# Allegro board Z-WAVE PROG_new.brd
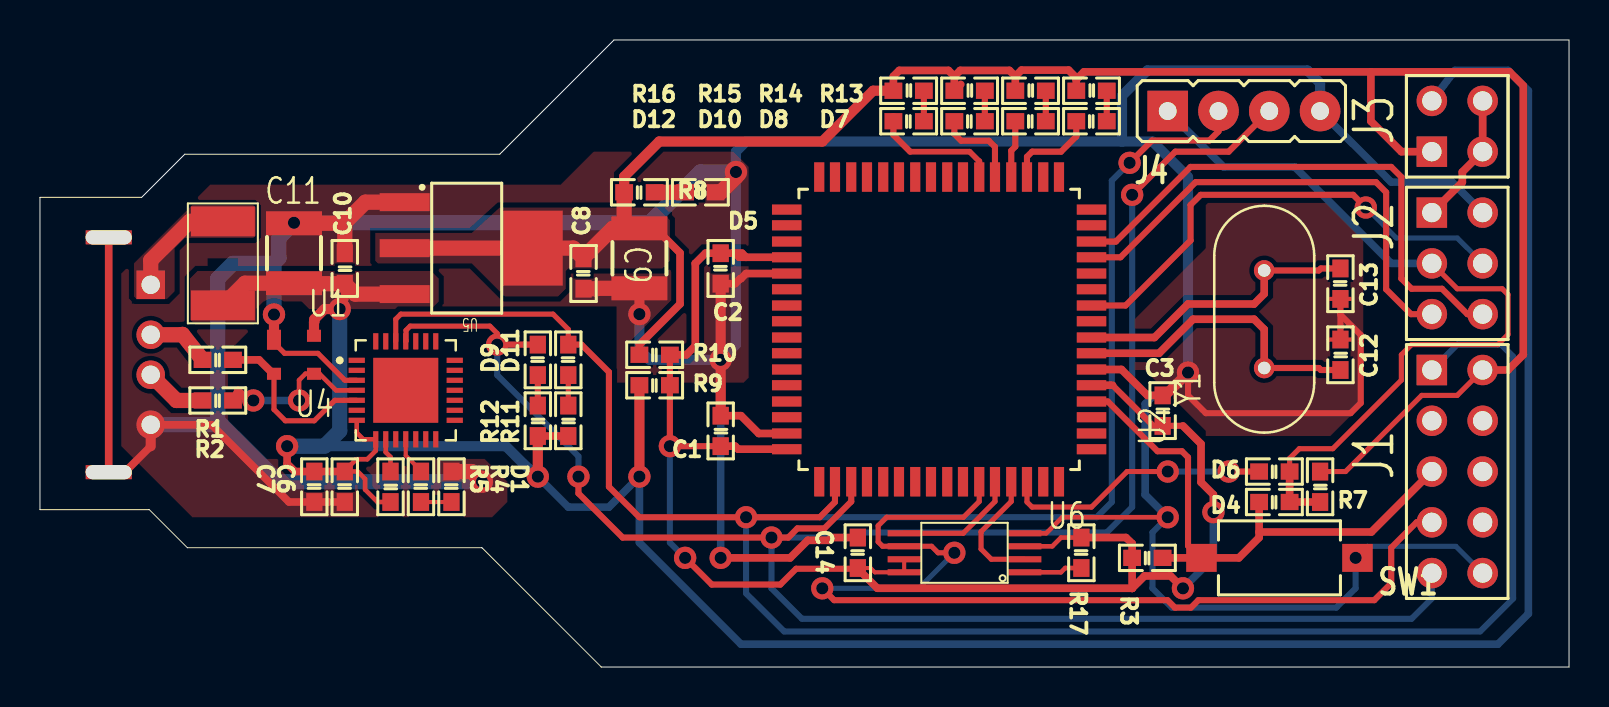
[diagram p0: board, top side]
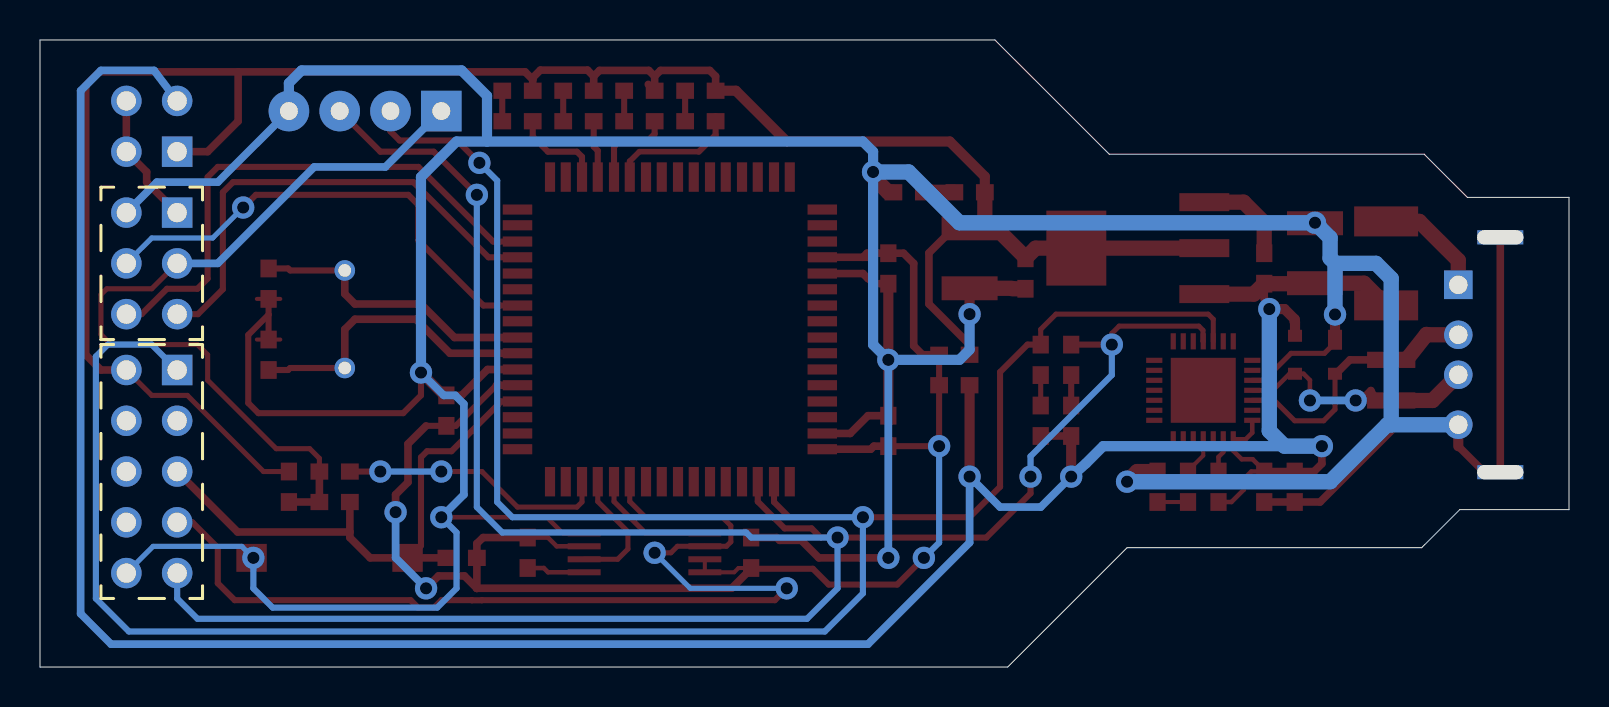
[diagram p1: board, bottom side, seen from below]

Outline 76.45 x 31.37 mm; copper layers: TOP, BOTTOM. Coordinates in mm from the lower left corner of the outline.
Outline path: 0,23.5 0,7.87 5.46,7.87 7.37,5.97 22.1,5.97 28.07,0 76.45,0 76.45,31.37 28.7,31.37 22.99,25.65 7.24,25.65 5.08,23.5 0,23.5

## Placement (name value [footprint] x y rotation side)
C1  33nF  [C0603]  34.04 11.81 90 top
C2  33nF  [C0603]  34.04 19.94 270 top
C3  33nF  [C0603]  56.13 12.83 90 top
C6  1uF  [C0603]  15.24 9.02 270 top
C7  100nF  [C0603]  13.72 9.02 270 top
C8  104  [C0603]  27.18 19.68 270 top
C9  10uF  [C1210]  29.97 20.45 270 top
C10  104  [C0603]  15.24 19.94 90 top
C11  10uF  [C1210]  12.7 20.7 90 top
C12  27pF  [C0603]  65.02 15.62 90 top
C13  27pF  [C0603]  65.02 19.18 270 top
C14  33nF  [C0603]  40.89 5.71 270 top
D1  LED  [D0603]  20.57 9.02 270 top
D4  DIODE  [D0603]  61.72 8.25 0 top
D5  LED  [D0603]  33.02 23.75 180 top
D6  DIODE  [D0603]  61.72 9.78 0 top
D7  LED  [D0603]  52.58 27.3 0 top
D8  LED  [D0603]  49.53 27.3 0 top
D9  LED  [D0603]  24.89 15.37 270 top
D10  LED  [D0603]  46.48 27.3 0 top
D11  LED  [D0603]  26.42 15.37 270 top
D12  LED  [D0603]  43.43 27.3 0 top
F1  -  [FUSE]  9.14 20.19 270 top
J1  ISP_ATPROG  [HEADER_5X2]  69.6 14.86 0 top
J2  HEADER 3X2  [HEADER_3X2]  69.6 22.73 0 top
J3  HEADER 2X2  [HEADER_2X2]  69.6 25.78 90 top
J4  HEADER 4  [HEADER_4X1_2P54MM]  56.39 27.81 0 top
R1  10R  [R0603]  8.89 15.37 0 top
R2  10R  [R0603]  8.89 13.33 0 top
R3  22K  [R0603]  55.37 5.46 0 top
R4  1K  [R0603]  19.05 9.02 270 top
R5  10K  [R0603]  17.53 9.02 90 top
R7  22K  [R0603]  64.01 9.02 90 top
R8  220  [R0603]  29.97 23.75 0 top
R9  0R  [R0603]  30.73 14.1 0 top
R10  0R  [R0603]  30.73 15.62 0 top
R11  220  [R0603]  26.42 12.32 90 top
R12  220  [R0603]  24.89 12.32 90 top
R13  220  [R0603]  52.58 28.83 180 top
R14  220  [R0603]  49.53 28.83 180 top
R15  220  [R0603]  46.48 28.83 180 top
R16  220  [R0603]  43.43 28.83 180 top
R17  22K  [R0603]  52.07 5.71 270 top
SW1  RST  [SMD_TACT_SWITCH_2PIN]  61.98 5.46 0 top
U1  CP2102  [QFN50P500X500X100-29N]  18.29 13.84 0 top
U2  ATMEGA128  [QFP80P1600X1600X120-64N]  44.96 16.89 90 top
U3  USB  [USBA_MALE]  4.83 15.62 270 top
U4  ESD_PRTR5  [SOT143B]  12.7 15.62 270 top
U5  LM1117  [SOT-223]  21.34 20.95 180 top
U6  AT25256/SOIC  [TSSOP-8]  46.23 5.71 180 top
Y1  CRYSTAL  [XTAL_ECS-250-20-4VX]  61.21 17.4 90 top

## Library data of the parts
C1-C3 C6-C8 C10 C12-C14 = CAP NP
C9 C11 = CAP: User Part Number: PartNr
D1 D5 D7-D12 = LED
D4 D6 = DIODE
F1 = FUSE
J1 = HEADER 5X2
J2 = HEADER 3X2
J3 = HEADER 2X2
J4 = HEADER 4
R1-R5 R7-R17 = RESISTOR
SW1 = SW PUSHBUTTON-SPST-NC
U1 = CP2102_1
U2 = ATMEGA128_0
U3 = USB
U4 = ESD_PRTR5_0
U5 = AMS1117/LM1117_1
U6 = AT25256/SOIC
Y1 = CRYSTAL

## Footprints (pads in the part's own frame, mm; a bottom-side part is the same pattern mirrored in y, then rotated)
C0603
  rect 0.889x0.813 smd: 1(-0.762,0) 2(0.762,0)
C1210
  rect 1.2x2.8 smd: 1(-1.5,0) 2(1.5,0)
D0603
  rect 0.889x0.813 smd: 1(-0.762,0) 2(0.762,0)
FUSE
  rect 1.5x3.2 smd: 1(-2.1,0) 2(2.1,0)
HEADER_2X2
  rect 1.524x1.524 hole 0.965: 1(0,0)
  round 1.524 hole 0.965: 2(2.54,0) 3(0,-2.54) 4(2.54,-2.54)
HEADER_3X2
  rect 1.524x1.524 hole 0.965: 1(0,0)
  round 1.524 hole 0.965: 2(2.54,0) 3(0,-2.54) 4(2.54,-2.54) 5(0,-5.08) 6(2.54,-5.08)
HEADER_4X1_2P54MM
  rect 2.032x2.032 hole 0.889: 1(0,0)
  round 2.032 hole 0.889: 2(2.54,0) 3(5.08,0) 4(7.62,0)
HEADER_5X2
  rect 1.524x1.524 hole 0.965: 1(0,0)
  round 1.524 hole 0.965: 2(2.54,0) 3(0,-2.54) 4(2.54,-2.54) 5(0,-5.08) 6(2.54,-5.08) 7(0,-7.62) 8(2.54,-7.62) 9(0,-10.16) 10(2.54,-10.16)
QFN50P500X500X100-29N
  rect 3.25x3.25 smd: (0,0)
  rect 0.81x0.26 smd: 1(-2.45,1.5) 2(-2.45,1) 3(-2.45,0.5) 4(-2.45,0) 5(-2.45,-0.5) 6(-2.45,-1) 7(-2.45,-1.5) 15(2.45,-1.5) 16(2.45,-1) 17(2.45,-0.5) 18(2.45,0) 19(2.45,0.5) 20(2.45,1) 21(2.45,1.5)
  rect 0.26x0.81 smd: 8(-1.5,-2.45) 9(-1,-2.45) 10(-0.5,-2.45) 11(0,-2.45) 12(0.5,-2.45) 13(1,-2.45) 14(1.5,-2.45) 22(1.5,2.45) 23(1,2.45) 24(0.5,2.45) 25(0,2.45) 26(-0.5,2.45) 27(-1,2.45) 28(-1.5,2.45)
QFP80P1600X1600X120-64N
  rect 1.473x0.508 smd: 1(-7.62,5.994) 2(-7.62,5.207) 3(-7.62,4.394) 4(-7.62,3.607) 5(-7.62,2.794) 6(-7.62,2.007) 7(-7.62,1.194) 8(-7.62,0.406) 9(-7.62,-0.406) 10(-7.62,-1.194) 11(-7.62,-2.007) 12(-7.62,-2.794) 13(-7.62,-3.607) 14(-7.62,-4.394) 15(-7.62,-5.207) 16(-7.62,-5.994) 33(7.62,-5.994) 34(7.62,-5.207) 35(7.62,-4.394) 36(7.62,-3.607) 37(7.62,-2.794) 38(7.62,-2.007) 39(7.62,-1.194) 40(7.62,-0.406) 41(7.62,0.406) 42(7.62,1.194) 43(7.62,2.007) 44(7.62,2.794) 45(7.62,3.607) 46(7.62,4.394) 47(7.62,5.207) 48(7.62,5.994)
  rect 0.508x1.473 smd: 17(-5.994,-7.62) 18(-5.207,-7.62) 19(-4.394,-7.62) 20(-3.607,-7.62) 21(-2.794,-7.62) 22(-2.007,-7.62) 23(-1.194,-7.62) 24(-0.406,-7.62) 25(0.406,-7.62) 26(1.194,-7.62) 27(2.007,-7.62) 28(2.794,-7.62) 29(3.607,-7.62) 30(4.394,-7.62) 31(5.207,-7.62) 32(5.994,-7.62) 49(5.994,7.62) 50(5.207,7.62) 51(4.394,7.62) 52(3.607,7.62) 53(2.794,7.62) 54(2.007,7.62) 55(1.194,7.62) 56(0.406,7.62) 57(-0.406,7.62) 58(-1.194,7.62) 59(-2.007,7.62) 60(-2.794,7.62) 61(-3.607,7.62) 62(-4.394,7.62) 63(-5.207,7.62) 64(-5.994,7.62)
R0603
  rect 0.889x0.813 smd: 1(-0.762,0) 2(0.762,0)
SMD_TACT_SWITCH_2PIN
  rect 1.524x1.397 smd: 1(-3.9,0) 2(3.9,0)
SOT143B
  rect 1x0.7 smd: 1(-0.75,-1)
  rect 0.6x0.7 smd: 2(0.95,-1) 3(0.95,1) 4(-0.95,1)
SOT-223
  rect 2.5x0.9 smd: 1(3.1,-2.3) 2(3.1,0) 3(3.1,2.3)
  rect 3x3.75 smd: 4(-3.3,0)
TSSOP-8
  rect 1.651x0.305 smd: 1(-3.017,0.975) 2(-3.017,0.325) 3(-3.017,-0.325) 4(-3.017,-0.975) 5(3.017,-0.975) 6(3.017,-0.325) 7(3.017,0.325) 8(3.017,0.975)
USBA_MALE
  rect 1.428x1.428 hole 0.92: 1(-3.5,0.71)
  round 1.428 hole 0.92: 2(-1,0.71) 3(1,0.71) 4(3.5,0.71)
  rect 0.7x2.3 hole 0.7x2.3: 5(-5.875,-1.39) 6(5.875,-1.39)
XTAL_ECS-250-20-4VX
  round 1.03 hole 0.63: 1(-2.44,0) 2(2.44,0)

## Nets
3V3: C8.1 C9.1 J1.2 J3.1(3) R7.2 R8.1 R10.1 R13.2 R14.2 R15.2 R16.2 U5.2(VO) U5.4(PAD)
5V: C6.1 C7.1 C10.1 C11.1 F1.2 J3.2(4) R5.1 R9.1 R11.1 R12.1 U1.7(REGIN) U1.8(VBUS) U4.4(VCC) U5.3(VI)
GND: C1.2 C2.2 C3.2 C6.2 C7.2 C8.2 C9.2 C10.2 C11.2 C12.2 C13.2 C14.1 D1.1(CATHODE) D5.1(CATHODE) J1.10 J2.2 J4.4 SW1.2 U1.3(GND) U2.22(GND_1) U2.53(GND_2) U2.63(GND) U3.4(GND) U3.5(SHEILD0) U3.6(SHEILD1) U4.1(GND) U5.1(GND) U6.4
CS_AT_N: U2.17((OC2/OC1C) PB7)
LEDA_AT: D7.1(CATHODE) U2.35(PC0 (A8))
LEDB_AT: D8.1(CATHODE) U2.36(PC1 (A9))
LEDC_AT: D10.1(CATHODE) U2.37(PC2 (A10))
LEDD_AT: D12.1(CATHODE) U2.38(PC3 (A11))
MCU_MISO: U2.13((MISO) PB3) U6.2(SO)
MCU_MOSI: U2.12((MOSI) PB2) U6.5(SI)
MCU_PDI: D11.1(CATHODE) J1.1 J4.2 U1.26(TXD) U2.2(RXD0/(PDI) PE0)
MCU_PDO: D9.1(CATHODE) J1.9 J4.3 U1.25(RXD) U2.3((TXD0/PDO) PE1)
MCU_RESET: D4.1(K) J1.5 R3.2 SW1.1 U2.20(RESET)
MCU_SCK: J1.7 U2.11((SCK) PB1) U6.6(SCLK)
MCU_VCC: C1.1 C2.1 C3.1 C14.2 R3.1 R9.2 R10.2 R17.1 U2.21(VCC_1) U2.52(VCC_2) U2.64(AVCC) U6.3(W\P\) U6.7(H\O\L\D\) U6.8(VCC)
ZWARE_RESET: D4.2(A) D6.2(A) J2.3 J4.1 R7.1
ZWARE_RESET_AT: D6.1(K) U2.14((OC0) PB4)
ZWARE_SPI_MISO: J2.6 U2.30((XCK1) PD5)
ZWARE_SPI_MOSI: J2.4 U2.26((SDA/INT1) PD1)
ZWARE_SPI_SCK: J2.5 U2.29((ICP1) PD4)
N00928: F1.1 U3.1(VBUS)
N01000: R1.1 U3.2(D-)
N01004: R2.1 U3.3(D+)
N01008: R1.2 U1.5(D-) U4.2(I/O1)
N01111: R2.2 U1.4(D+) U4.3(I/O2)
N01827: C12.1 U2.23(XTAL2) Y1.1
N01839: C13.1 U2.24(XTAL1) Y1.2
N007350: D5.2(ANODE) R8.2
N07800: R5.2 U1.9(RST)
N2005450: R4.1 U1.11(SUSPEND)
N2005452: D1.2(ANODE) R4.2
N2010082: D7.2(ANODE) R13.1
N2010088: D8.2(ANODE) R14.1
N2029623: R17.2 U6.1(C\S\)
N2044968: J2.1 J3.3(1) J3.4(2)
N2049166: D10.2(ANODE) R15.1
N2049170: D12.2(ANODE) R16.1
N20114400: D11.2(ANODE) R11.2
N20116730: D9.2(ANODE) R12.2

Pads without a net: J1 3 4 6 8; U1 1 2 6 10 12 13 14 15 16 17 18 19 20 21 22 23 24 27 28; U2 1 4 5 6 7 8 9 10 15 16 18 19 25 27 28 31 32 33 34 39 40 41 42 43 44 45 46 47 48 49 50 51 54 55 56 57 58 59 60 61 62

## Via types
v1: diameter 1.118, hole 0.61, TOP to BOTTOM, 31 vias

## Routing (per net, layer and track width the routed paths; a pad name or vN(x,y) marks a point on that pad's centre or on a via; arc(x,y) is an arc through that point)
3V3: length 107.1
  TOP w0.254: R7.2 65.28,9.78 69.09,13.59 70.87,13.59 J1.2
  TOP w0.381: 48.77,29.55 49.08,29.86 51.44,29.86 51.82,29.48 51.82,29.39 ; 48.77,29.55 48.48,29.84 46.01,29.84 45.72,29.55 ; 48.77,29.55 R14.2 ; 46.04,29.15 R15.2 45.72,29.55 ; 66.55,29.77 66.55,27.3 68.07,25.78 J3.1 ; 66.55,29.77 73.48,29.77 74.17,29.08 74.17,15.62 73.41,14.86 J1.2 ; 66.55,29.77 52.2,29.77 51.82,29.39 ; C9.1 30.77,21.95 32,20.72 32,18.16 29.97,16.13 R10.1 ; 45.72,29.55 45.43,29.84 42.96,29.84 42.67,29.55 R16.2 ; 51.82,29.39 R13.2 51.78,28.83
  TOP w0.508: R16.2 41.66,28.83 39.12,26.29 30.96,26.29 29.21,24.54 R8.1
  TOP w0.762: C9.1 29.21,21.95 ; 29.21,21.95 28.64,21.95 27.18,20.49 C8.1 26.67,20.95 U5.4 U5.2 ; 29.21,21.95 R8.1
5V: length 142.5
  TOP w0.229: 16.79,11.3 16.79,11.29 ; 16.79,11.3 U1.8 16.17,11.39 15.84,11.72 U1.7 ; 16.79,11.3 16.79,10.82 16.36,10.39 15.82,10.39 15.24,9.82 C6.1 15.89,9.78 16.26,9.41 16.26,8.88 16.88,8.25 R5.1
  TOP w0.381: 14.73,17.91 15.24,18.41 C10.1 ; C6.1 C7.1 12.75,9.78 12.36,10.17 v1(12.36,11.05) ; R11.1 R12.1
  TOP w0.508: v1(14.99,17.91) 14.22,17.91 13.72,17.4 13.72,17.27 13.7,17.25 U4.4 ; v1(29.97,9.53) R9.1 ; R12.1 v1(24.89,9.53)
  TOP w0.762: F1.2 10.25,19.2 C11.1 12.72,19.18 C10.1 15.76,18.66 U5.3
  BOTTOM w0.381: J3.2 70.75,29.84 73.41,29.84 74.42,28.83 74.42,2.67 72.9,1.14 35.05,1.14 29.97,6.22 v1(29.97,9.53) 28.45,8 26.42,8 v1(24.89,9.53)
  BOTTOM w0.508: v1(24.89,9.53) 24.15,10.19 23.29,11.05 14.22,11.05
  BOTTOM w0.762: v1(12.36,11.05) 14.22,11.05 14.99,11.81 v1(14.99,17.91)
GND: length 275.4
  TOP w0.203: 65.61,16.38 C12.2 64.44,16.38 ; 65.61,18.41 C13.2 64.44,18.41
  TOP w0.229: U6.4 50.31,6.69 51.11,7.49 v1(56.39,7.49)
  TOP w0.254: U1.3 15.25,14.34 13.9,15.69 12.23,15.69 11.7,16.22 U4.1 ; 27.84,18.92 27.86,18.95
  TOP w0.305: 65.02,17.63 66.04,16.61 66.04,13.21 65.53,12.7 58.29,12.7 57.4,13.59 v1(57.4,14.73) ; 65.02,17.63 C12.2 ; 65.02,17.63 C13.2
  TOP w0.381: v1(34.04,5.46) 37.51,5.46 38.39,6.34 39.47,6.34 39.61,6.48 C14.1 ; 5.54,11.05 4.24,9.75 U3.6 U3.5 ; v1(12.7,22.23) C11.2 ; C6.2 C7.2 12.45,8.25 8.58,12.12 U3.4 ; C1.2 35.05,12.57 35.94,11.68 U2.63 ; U2.53 35.31,19.68 35.05,19.43 35.01,19.43 34.76,19.18 C2.2 ; U2.22 54.08,14.88 55.37,13.59 C3.2 ; U5.1 17.44,23.25 17.41,23.28
  TOP w0.508: v1(29.97,17.65) C9.2 ; U3.4 5.54,11.05 ; U4.1 v1(11.7,17.64) ; C3.2 56.26,13.59 v1(57.4,14.73) ; C1.2 v1(34.04,15.37) C2.2
  TOP w0.762: C10.2 15.24,22.2 ; 15.24,22.2 15.24,22.23 16.27,23.25 17.44,23.25 ; 15.24,22.2 C11.2 ; C8.2 27.84,18.92 ; D5.1 34.04,23.75 34.8,24.51 v1(34.8,24.77) ; v1(22.1,9.27) 21.59,9.78 D1.1 ; 27.86,18.95 C9.2
  BOTTOM w0.254: J1.10 70.8,6.04 66.36,6.04 v1(65.79,5.46)
  BOTTOM w0.305: v1(65.79,5.46) 65.79,3.94 64.82,2.97 56.59,2.97 55.63,3.94 55.63,6.73 v1(56.39,7.49)
  BOTTOM w0.381: v1(56.39,7.49) 55.26,8.62 55.26,13.16 55.69,13.59 56.26,13.59 v1(57.4,14.73) ; J4.4 67.56,24.26 70.61,24.26 J2.2 ; v1(34.04,15.37) v1(34.04,5.46)
  BOTTOM w0.508: 54.1,26.29 54.1,28.57 55.37,29.84 63.37,29.84 64.01,29.21 J4.4 ; 54.1,26.29 35.31,26.29 34.8,25.78 v1(34.8,24.77) 34.8,16.13 v1(34.04,15.37) 30.48,15.37 29.97,15.88 v1(29.97,17.65) ; 54.1,26.29 55.63,26.29 57.4,24.51 v1(57.4,14.73)
  BOTTOM w0.762: 8.89,12.12 U3.4 ; 8.89,12.12 9.09,12.12 11.94,9.27 v1(22.1,9.27) ; 8.89,12.12 8.89,19.43 9.65,20.19 11.68,20.19 ; v1(11.7,17.64) 11.7,20.19 11.68,20.19 ; 11.68,20.19 11.95,20.45 11.95,21.47 v1(12.7,22.23) 30.48,22.23 33.02,24.77 v1(34.8,24.77)
LEDA_AT: length 4.7
  TOP w0.305: U2.35 49.35,25.53 49.61,25.78 51.05,25.78 51.82,26.54 D7.1
LEDB_AT: length 2.9
  TOP w0.305: U2.36 48.56,25.83 48.77,26.04 D8.1
LEDC_AT: length 4.4
  TOP w0.305: U2.37 47.75,26.02 47.45,26.33 46.06,26.33 45.72,26.67 D10.1
LEDD_AT: length 6.6
  TOP w0.279: 43.51,25.78 46.48,25.78 46.96,25.3
  TOP w0.305: U2.38 46.96,25.3 ; 42.67,27.56 D12.1 42.67,26.62 43.51,25.78
MCU_MISO: length 6.4
  TOP w0.254: U6.2 47.57,5.39 47.06,5.9 47.06,6.77 48.56,8.28 U2.13
MCU_MOSI: length 6.2
  TOP w0.254: U2.12 47.75,8.28 46.16,6.69 U6.5
MCU_PDI: length 135.2
  TOP w0.254: D11.1 26.42,16.89 25.65,17.65 18.04,17.65 17.79,17.4 U1.26
  TOP w0.305: v1(54.48,25.22) 55.6,26.34 58.47,26.34 58.93,26.8 J4.2 ; U2.2 39.75,8.25 38.99,7.49 v1(35.31,7.49) 29.97,7.49 28.45,9.02 28.45,14.76 27.08,16.13 D11.1
  BOTTOM w0.305: J1.1 70.87,16.13 73.06,16.13 73.66,15.53 73.66,3.43 72.01,1.78 37.21,1.78 35.31,3.68 v1(35.31,7.49) 52.83,7.49 53.59,8.25 53.59,24.33 v1(54.48,25.22)
MCU_PDO: length 114.5
  TOP w0.254: v1(22.86,16.13) 22.86,16.69 22.49,17.05 18.51,17.05 18.3,16.85 18.3,16.31 U1.25
  TOP w0.305: U2.3 40.56,8.28 39.22,6.93 37.87,6.93 37.41,6.48 v1(36.58,6.48) 29.13,6.48 26.92,8.69 v1(26.92,9.53) ; 54.61,23.24 v1(54.61,23.62) 56.77,25.78 59.44,25.78 J4.3 ; D9.1 v1(22.86,16.13)
  BOTTOM w0.305: v1(22.86,16.13) 22.86,14.61 26.92,10.54 v1(26.92,9.53) ; J1.9 69.6,3.43 68.58,2.41 38.1,2.41 36.58,3.94 v1(36.58,6.48) 40.89,6.48 41.15,6.73 53.34,6.73 54.61,8 v1(54.61,23.62)
MCU_RESET: length 28.2
  TOP w0.305: 58.01,5.46 57.4,6.07 57.4,10.49 57.1,10.79 55.88,10.79 53.39,13.28 U2.20
  TOP w0.381: 60.96,6.76 60.96,6.48 59.94,5.46 SW1.1 R3.2 ; 60.96,6.76 D4.1 ; 60.96,6.76 66.57,6.76 J1.5
MCU_SCK: length 52.4
  TOP w0.254: v1(45.72,5.71) 44.91,5.71 44.58,6.04 U6.6 42.13,6.04 41.91,6.26 41.91,7.07 42.33,7.49 46.18,7.49 46.96,8.28 U2.11
  TOP w0.305: J1.7 68.83,7.24 67.56,5.97 67.56,4.19 66.72,3.34 57.92,3.34 57.55,2.97 56.75,2.97 56.38,3.34 54.86,3.34 54.86,3.34 54.36,3.34 54.36,3.34 39.71,3.34 v1(39.12,3.94)
  BOTTOM w0.254: v1(39.12,3.94) 43.94,3.94 v1(45.72,5.71)
MCU_VCC: length 80
  TOP w0.203: U6.7 U6.8 41.74,4.74 41.53,4.95 C14.2
  TOP w0.229: U6.3 50.62,6.04 51.05,6.48 R17.1
  TOP w0.254: 40.89,4.91 C14.2
  TOP w0.305: R10.2 R9.2 v1(31.5,11.05) C1.1 ; 57.15,12.06 C3.1 55.66,12.06 53.63,14.1 ; v1(32.26,5.46) 33.59,4.12 37.02,4.12 37.81,4.91 40.89,4.91
  TOP w0.381: 57.15,12.06 58.05,11.16 58.05,9.24 58.67,8.62 v1(58.67,7.75) ; 40.89,4.91 41.87,3.94 54.61,3.94 54.61,3.94 ; 54.61,3.94 55.23,4.56 56.53,4.56 v1(57.15,3.94) ; 54.61,3.94 R3.1 54.61,6.18 54.3,6.48 R17.1 ; 53.63,14.1 U2.21 ; 34.76,20.7 35.1,20.7 35.31,20.5 ; 34.76,20.7 34.96,20.5 35.31,20.5 ; 34.76,20.7 C2.1 33.27,20.7 32.77,20.19 32.77,16.07 32.32,15.62 R10.2 ; U2.64 34.91,10.9 34.76,11.05 C1.1 ; 35.31,20.5 U2.52
  BOTTOM w0.305: v1(32.26,5.46) 31.5,6.22 v1(31.5,11.05)
  BOTTOM w0.381: v1(57.15,3.94) 58.67,5.46 v1(58.67,7.75)
ZWARE_RESET: length 40.8
  TOP w0.254: D6.2 62.48,10.44 62.97,10.92 64.64,10.92 68.07,14.35 68.07,15.62 68.58,16.13 72.9,16.13 73.41,16.64 73.41,18.63 73.11,18.92 70.87,18.92 J2.3
  TOP w0.381: R7.1 D4.2 D6.2
  BOTTOM w0.381: J4.1 59.18,25.02 62.74,25.02 67.56,20.19 J2.3
ZWARE_RESET_AT: length 13.5
  TOP w0.254: U2.14 49.35,8.25 49.61,8 52.58,8 54.36,9.78 v1(56.39,9.78)
  TOP w0.305: v1(59.44,9.78) D6.1
  BOTTOM w0.305: v1(56.39,9.78) v1(59.44,9.78)
ZWARE_SPI_MISO: length 27.1
  TOP w0.305: U2.30 53.8,21.29 57.53,25.02 67.56,25.02 68.07,24.51 68.07,19.43 68.58,18.92 70.1,18.92 71.37,17.65 J2.6
ZWARE_SPI_MOSI: length 24.3
  TOP w0.305: v1(66.29,22.99) 65.66,23.62 58.04,23.62 57.53,23.11 57.53,21.34 54.28,18.08 U2.26
  BOTTOM w0.254: v1(66.29,22.99) 67.82,21.46 70.87,21.46 J2.4
ZWARE_SPI_SCK: length 24.2
  TOP w0.305: U2.29 54.03,20.5 57.78,24.26 66.8,24.26 67.31,23.75 67.31,18.9 68.55,17.65 J2.5
N00928: length 5.6
  TOP w0.762: U3.1 5.54,20.34 7.49,22.29 F1.1
N01000: length 3.2
  TOP w0.762: U3.2 7.11,16.62 7.13,16.64 R1.1
N01004: length 3.1
  TOP w0.762: R2.1 6.82,13.33 U3.3
N01008: length 9.4
  TOP w0.203: 15.2,13.34 15.2,13.34 14.74,13.34 14.74,13.34
  TOP w0.254: U1.5 14.74,13.34 ; U4.2 11.7,12.89 12.27,12.32 13.72,12.32 14.74,13.34
  TOP w0.381: R1.2 10.95,15.37 11.65,14.67 U4.2
N01111: length 8.2
  TOP w0.229: U1.4 14.8,13.84 13.97,14.67 U4.3 13.27,14.67 12.95,14.35 v1(12.95,13.33)
  TOP w0.381: v1(10.67,13.33) 10.36,13.37 9.91,13.83 R2.2
  BOTTOM w0.381: v1(10.67,13.33) v1(12.95,13.33)
N01827: length 15.3
  TOP w0.305: Y1.1 63.95,14.96 64.05,14.86 C12.1
  TOP w0.381: U2.23 55.96,15.7 57.66,17.4 60.71,17.4 61.21,16.89 Y1.1
N01839: length 14.6
  TOP w0.305: C13.1 64.05,19.94 63.95,19.84 Y1.2
  TOP w0.381: U2.24 55.73,16.48 57.4,18.16 60.71,18.16 61.21,18.67 Y1.2
N007350: length 1.5
  TOP w0.762: R8.2 D5.2
N07800: length 1.7
  TOP w0.229: R5.2 17.53,10.51 17.29,10.75 U1.9
N2005450: length 1.9
  TOP w0.203: R4.1 19.05,9.82 18.29,10.58 U1.11
N2005452: length 1.5
  TOP w0.203: R4.2 D1.2
N2010082: length 1.5
  TOP w0.305: R13.1 D7.2
N2010088: length 1.5
  TOP w0.305: R14.1 D8.2
N2029623: length 2.9
  TOP w0.229: U6.1 51.05,4.74 51.26,4.95 R17.2
N2044968: length 6.6
  TOP w0.381: J2.1 71.12,24.26 71.12,24.77 J3.3 J3.4
N2049166: length 1.5
  TOP w0.305: R15.1 D10.2
N2049170: length 1.5
  TOP w0.305: R16.1 D12.2
N20114400: length 1.5
  TOP w0.254: D11.2 R11.2
N20116730: length 1.5
  TOP w0.305: R12.2 D9.2

## Copper pours and planes (outline as drawn; the poured copper is in the pictures)
3V3 on TOP: 16.76,21.72 16.76,20.32 16.89,20.19 21.59,20.19 23.24,18.54 25.91,18.54 26.29,18.92 26.29,19.81 26.42,19.94 31.11,19.94 31.5,20.32 31.5,22.35 30.86,22.99 22.99,22.99 21.59,21.72
5V on TOP: 7.49,17.4 7.49,19.43 7.87,19.81 19.56,19.81 19.94,19.43 19.94,18.29 19.56,17.91 13.46,17.91 13.08,18.29 11.18,18.29 10.79,17.91 10.79,17.27 10.67,17.14 7.75,17.14
GND on TOP: 4.06,11.05 7.62,7.49 22.61,7.49 23.37,8.25 23.37,9.27 22.22,10.41 11.3,10.41 9.4,12.32 9.4,15.75 11.68,18.03 28.83,18.03 28.83,14.22 35.18,14.22 35.43,14.48 35.43,25.02 34.67,25.78 27.69,25.78 26.03,24.13 8.51,24.13 4.06,19.68
GND on TOP: 54.74,14.86 55.25,14.86 58.29,11.81 58.29,11.56 64.52,11.56 66.17,13.21 66.17,21.34 64.14,23.37 58.55,23.37 58.29,23.11 58.29,20.95 54.74,17.4
N00928 on TOP: 4.83,18.41 6.35,18.41 6.73,18.8 6.73,20.95 7.24,21.46 10.67,21.46 10.79,21.59 10.79,22.99 10.67,23.11 7.62,23.11 4.7,20.19 4.7,18.54
